# Altium PCB Funkcijski_generator_pcb.PcbDoc
Units mil, origin at the board's own origin, x right, y up, seen from the top; angles counter-clockwise.
Board outline 2185 x 1870 mil, 2 copper layers (Top Layer, Bottom Layer); 16 components, 13 nets, 48 pads, 0 vias.
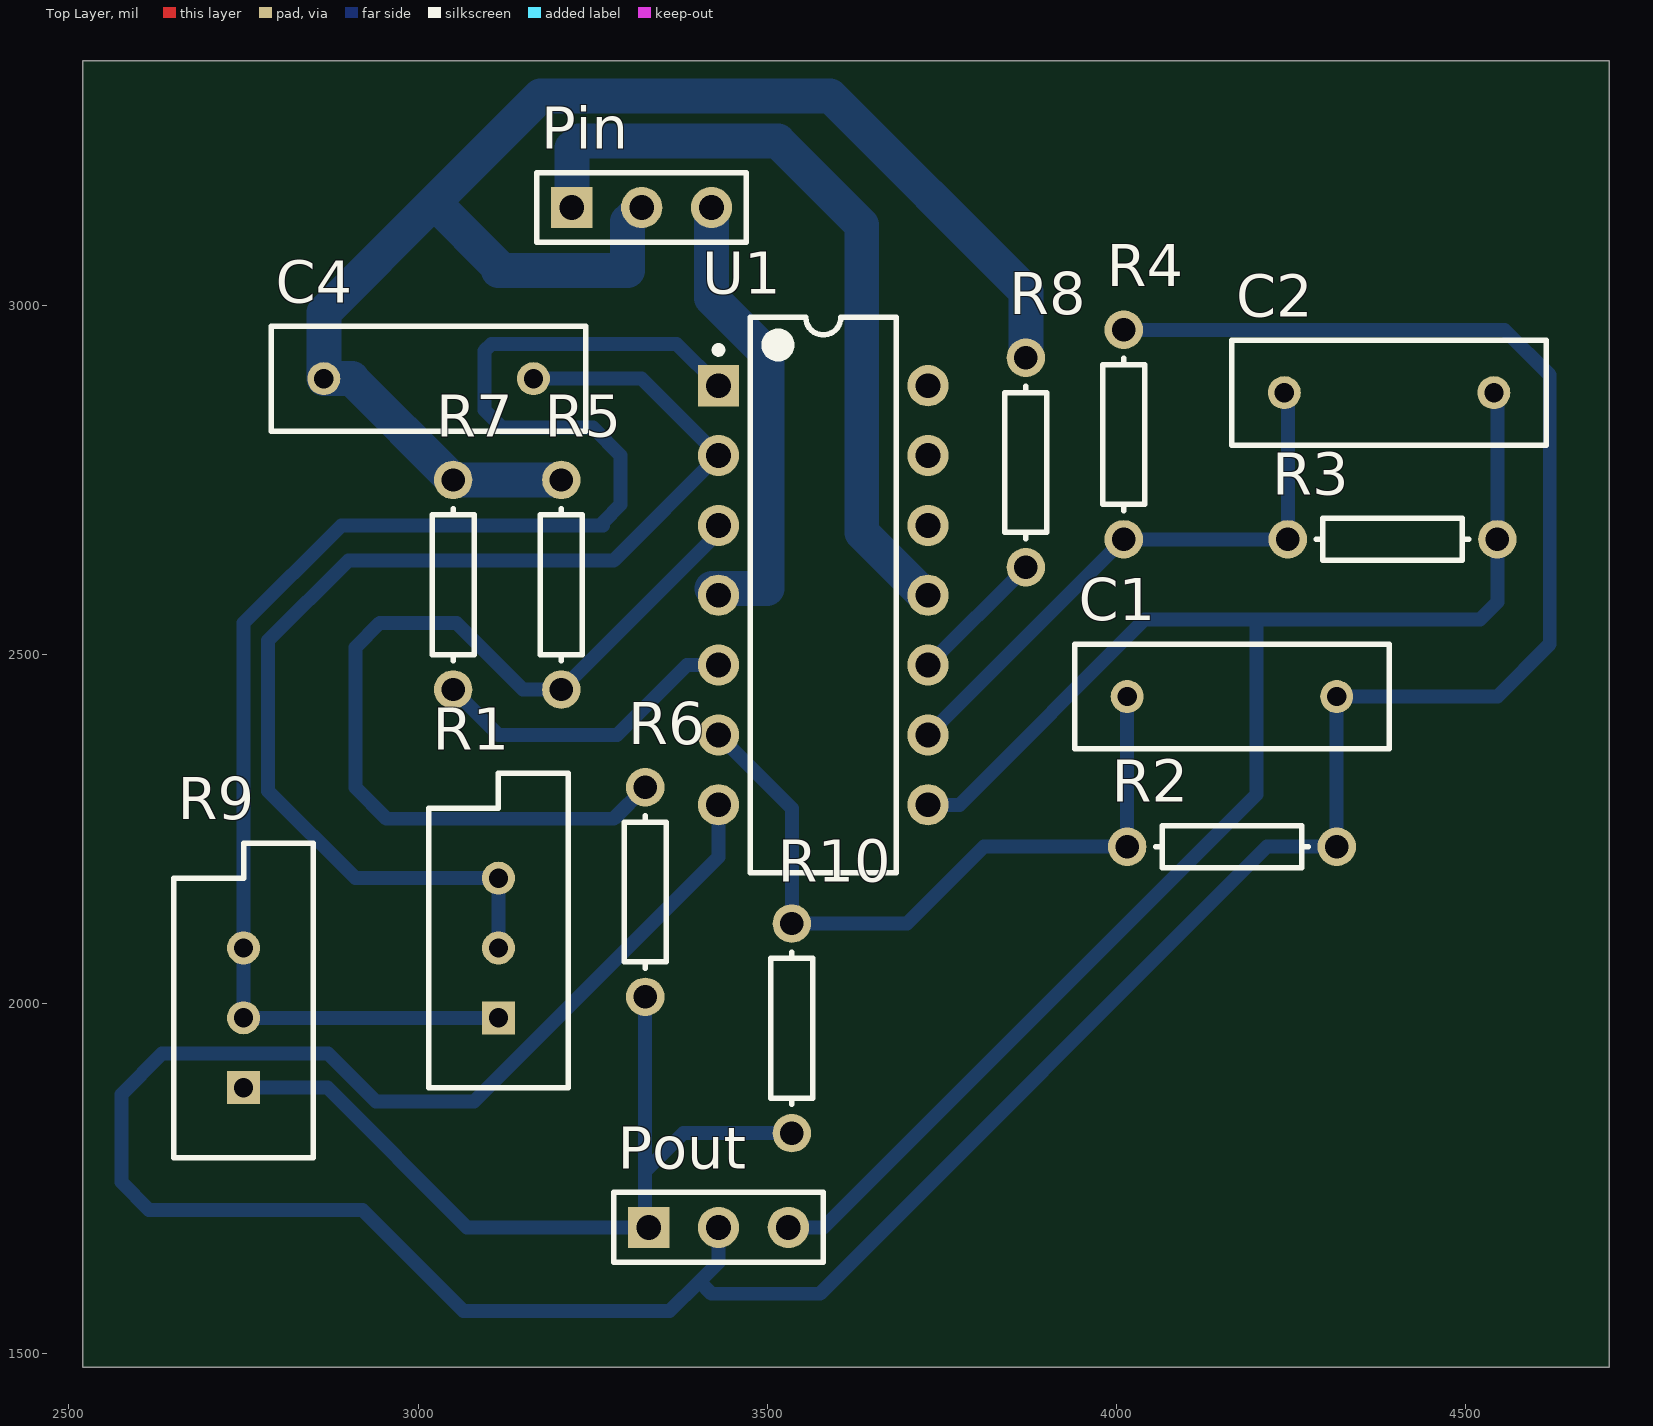
[diagram p0: Top Layer view]
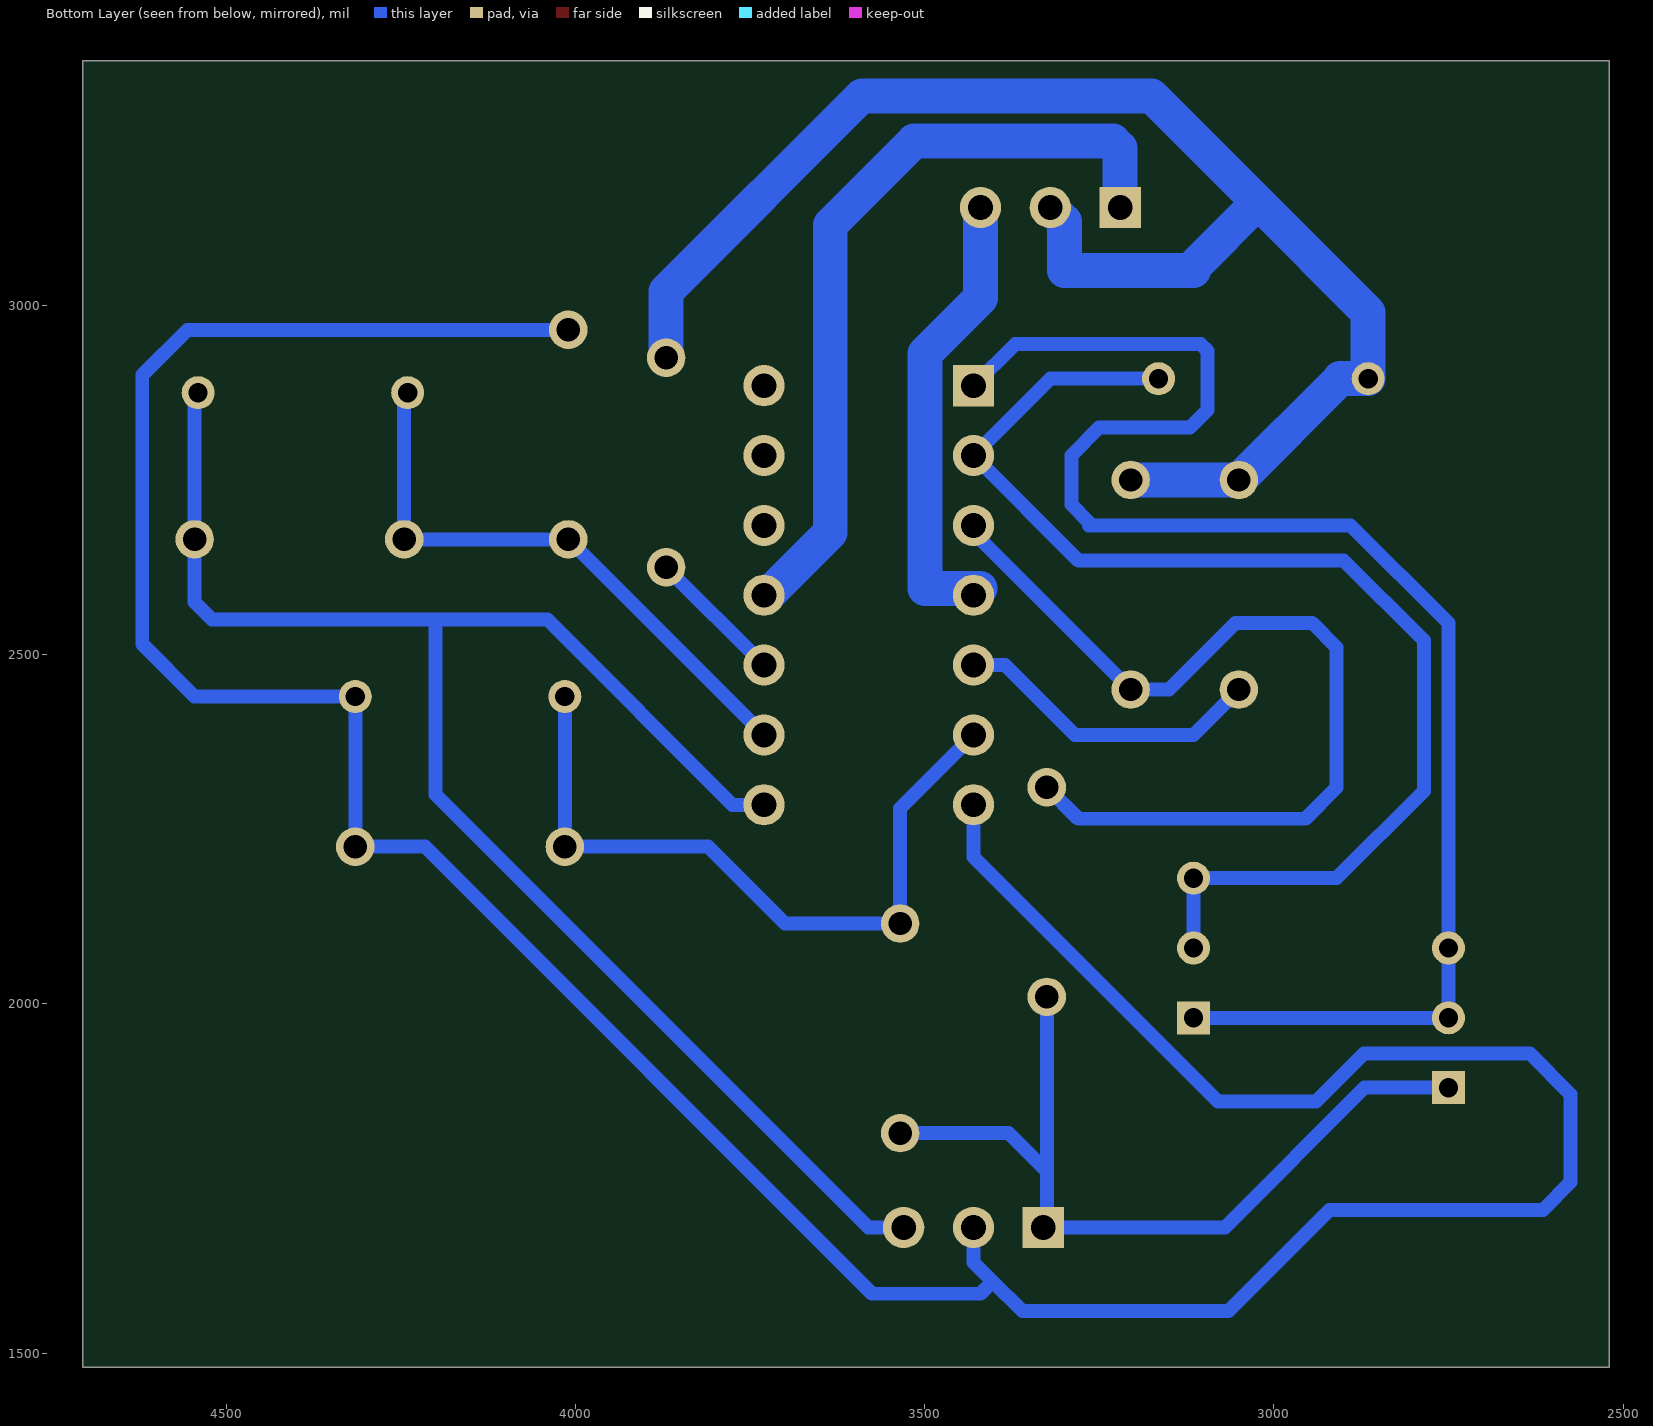
[diagram p1: Bottom Layer view, seen from below]

## Layer stack, top to bottom
Top Solder: solder mask 0.4, Solder Resist, Dk 3.5
Top Layer: signal copper 1.4
Dielectric 1: dielectric 12.6, FR-4, Dk 4.8
Bottom Layer: signal copper 1.4
Bottom Solder: solder mask 0.4, Solder Resist, Dk 3.5

## Board outline
2520,1480 4705,1480 4705,3350 2520,3350

## Design rules (kind name [scope] priority, off if disabled: settings)
Clearance Poligon [InPolygon] p1: gap=15 ignorepadtopadclearanceinfootprint=FALSE
Clearance [All] p2: gap=15 ignorepadtopadclearanceinfootprint=FALSE
PolygonConnect [All] p1: connectstyle=Relief reliefconductorwidth=10 reliefentries=4 polygonreliefangle="90 Angle" airgapwidth=10
RoutingLayers [All] p1: top layer_v5=FALSE bottom layer_v5=TRUE
RoutingVias [All] p1: holewidth=28 width=50 viastyle="Through Hole" minholewidth=28 minwidth=50 maxholewidth=28 maxwidth=50
SolderMaskExpansion [All] p1: expansion=4
Width WidthPower [InNetClass('Power')] p1: maxlimit=50 minlimit=50 preferedwidth=50
Width WidthSignals [InNetClass('Signals')] p2: maxlimit=20 minlimit=20 preferedwidth=20
29 further rules are at their usual default settings.

## Classes and differential pairs
net class Signals: NetC1_2 NetC2_2 NetC4_2 NetR1_1 NetR5_2 NetR7_2 NetR8_2 Vsine Vsquare Vtriangle
net class Power: GND VCC VEE

## Components (designator, comment, footprint, x,y, rotation, side; value= is the part's Value field where it differs from the comment)
C1 "Cap" RAD-0.3 4165,2440 r180 top value=220nF
C2 "Cap" RAD-0.3 4390,2875 r180 top value=10nF
C4 "Cap" RAD-0.3 3015,2895 r0 top value=100nF
Pin "Header 3" HDR1X3 3220,3140 r0 top
Pout "Header 3" HDR1X3 3330,1680 r0 top
R1 "RPot" VR5 3115,2080 r90 top value=200K
R2 "Res1" AXIAL-0.3 4165,2225 r0 top value=100K
R3 "Res1" AXIAL-0.3 4395,2665 r0 top value=220K
R4 "Res1" AXIAL-0.3 4010,2815 r270 top value=100K
R5 "Res1" AXIAL-0.3 3205,2600 r270 top value=27K
R6 "Res1" AXIAL-0.3 3325,2160 r270 top value=90K
R7 "Res1" AXIAL-0.3 3050,2600 r270 top value=10K
R8 "Res1" AXIAL-0.3 3870,2775 r270 top value=460K
R9 "RPot" VR5 2750,1980 r90 top value=10K
R10 "Res1" AXIAL-0.3 3535,1965 r90 top value=4.7K
U1 "LM324AD" DIP-14 3580,2585 r0 top

## Footprints (in the part's own frame and the unit in brackets; to place one, negate y for a bottom-side part, rotate by r counter-clockwise, add the part's x,y. Pads: shape width x height; smd on the part's side, far side on the other; paste and mask are expansions set on the pad)
AXIAL-0.3 [mm] "Axial Device, Thru-Hole; 2 Leads; 0.3 in Pin Spacing"
  round 1.4 hole 0.85: 1(-3.81,0) 2(3.81,0)
  silkscreen extent -2.77,-0.76 2.77,0.76
DIP-14 [mm] "DIP; 14 Leads; Row Spacing 7.62 mm; Pitch 2.54 mm"
  rect 1.5x1.5 hole 0.9: 1(-3.81,7.62)
  round 1.5 hole 0.9: 2(-3.81,5.08) 3(-3.81,2.54) 4(-3.81,0) 5(-3.81,-2.54) 6(-3.81,-5.08) 7(-3.81,-7.62) 8(3.81,-7.62) 9(3.81,-5.08) 10(3.81,-2.54) 11(3.81,0) 12(3.81,2.54) 13(3.81,5.08) 14(3.81,7.62)
  silkscreen extent -3.93,-10.1 2.65,10.1, body extent -3.6,-10.1 3.6,10.1, height 5.08
HDR1X3 [mm] "Connector; Header; 3 Position"
  rect 1.5x1.5 hole 0.9: 1(0,0)
  round 1.5 hole 0.9: 2(2.54,0) 3(5.08,0)
  silkscreen extent -1.27,-1.27 6.35,1.27
RAD-0.3 [mm] "Radial Cap, Thru-Hole; 2 Leads; 0.3 in Pin Spacing"
  round 1.2 hole 0.7: 1(-3.81,0) 2(3.81,0)
  silkscreen extent -5.71,-1.91 5.71,1.91
VR5 [mm] "Thru-Hole; 3 Leads"
  rect 1.2x1.2 hole 0.7: 1(-2.54,0)
  round 1.2 hole 0.7: 2(0,0) 3(2.54,0)
  silkscreen extent -5.08,-2.54 6.35,2.54

## Part data
C1 C2 C4: "Capacitor", LatestRevisionDate=17-Jul-2002, LatestRevisionNote="Re-released for DXP Platform.", PackageDescription="Radial Cap, Thru-Hole; 2 Leads; 0.3 in Pin Spacing", PackageReference=RAD-0.3, Published=8-Jun-2000, Publisher="Altium Limited"
Pin Pout: "Header, 3-Pin", LatestRevisionDate=17-Jul-2002, LatestRevisionNote="Re-released for DXP Platform.", Publisher="Altium Limited"
R1 R9: "Potentiometer", LatestRevisionDate=17-Jul-2002, LatestRevisionNote="Re-released for DXP Platform.", PackageDescription="Variable Resistor, Thru-Hole; 3 Leads", PackageReference=VR5, Published=8-Jun-2000, Publisher="Altium Limited", Set Position=0.5, Sim Note="Enter the Resistance value and the set point into parameter fields."
R2 R3 R4 R5 R6 R7 R8 R10: "Resistor", LatestRevisionDate=17-Jul-2002, LatestRevisionNote="Re-released for DXP Platform.", PackageDescription="Axial Device, Thru-Hole; 2 Leads; 0.3 in Pin Spacing", PackageReference=AXIAL-0.3, Published=8-Jun-2000, Publisher="Altium Limited"
U1: "Low-Power Quad Operational Amplifier", Code_IPC=SOIC127P600-14, ComponentLink1Description="Manufacturer Link", ComponentLink1URL=http://www.st.com/, ComponentLink2Description=Datasheet, ComponentLink2URL=http://www.st.com/stonline/products/literature/ds/4797/lm224a.pdf, DatasheetVersion=Nov-1997, LatestRevisionDate=13-Apr-2006, LatestRevisionNote="IPC-7351 Footprint Added.", PackageDescription="14-Pin Small Outline Integrated Circuit 1.27 mm Pitch", PackageReference=SO14, PackageVersion=Sep-1998, Published=24-Aug-2001, Publisher="Altium Limited"

## Nets (pads, with @x,y where several pads share a name; then routed paths per layer and width w, separated by ;. In a path a pad name is that pad's centre, name@x,y a point inside that pad or via, vN(x,y) a via of type N, cw(c..) or ccw(c..) an arc to the next point about the centre after c; other vN are vias at no path point)
GND: C4.1 Pin.2 R5.1 R7.1 R8.1 | length 2258.5
  Bottom Layer w50: R5.1 R7.1 2905,2895 C4.1 2865,2990 3022.5,3147.5 ; Pin.2 3300,3120 3300,3050 3115,3050 3115,3055 3022.5,3147.5 ; R8.1 3870,3020 3590,3300 3175,3300 3022.5,3147.5
NetC1_2: C1.2 R2.1 R10.2 U1.6 | length 1054.1
  Bottom Layer w20: U1.6 3535,2280 R10.2 3700,2115 3810,2225 R2.1 C1.2
NetC2_2: C2.2 R3.1 R4.2 U1.9 | length 843.1
  Bottom Layer w20: U1.9 R4.2 R3.1 4245,2870 C2.2
NetC4_2: C4.2 R1.2 R1.3 U1.2 | length 1762.1
  Bottom Layer w20: R1.2 R1.3 2910,2180 2785,2305 2785,2520 2900,2635 3280,2635 U1.2 3320,2895 C4.2
NetR1_1: R1.1 R9.2 R9.3 U1.1 | length 2284.3
  Bottom Layer w20: R1.1 R9.2 R9.3 2750,2545 2890,2685 3265,2685 3265,2690 3290,2715 3290,2785 3250,2825 3120,2825 3095,2850 3095,2935 3105,2945 3370,2945 U1.1
NetR5_2: R5.2 R6.1 U1.3 | length 1329.3
  Bottom Layer w20: R6.1 3280,2265 2955,2265 2910,2310 2910,2510 2945,2545 3055,2545 3150,2450 R5.2 3430,2675 U1.3
NetR7_2: R7.2 U1.5 | length 448.3
  Bottom Layer w20: R7.2 3115,2385 3285,2385 3385,2485 U1.5
NetR8_2: R8.2 U1.10 | length 198
  Bottom Layer w20: U1.10 R8.2
VCC: Pin.3 U1.4 | length 671.1
  Bottom Layer w50: Pin.3 3420,3010.62 3499.53,2931.1 3499.53,2594.64 3420.36,2594.64 U1.4
VEE: Pin.1 U1.11 | length 1126.1
  Bottom Layer w50: Pin.1 3220,3225 3230,3235 3515,3235 3635,3115 3635,2675 3725,2585 U1.11
Vsine: C2.1 Pout.3 R3.2 U1.8 | length 2414
  Bottom Layer w20: Pout.3 3580,1680 4200,2300 4200,2550 ; U1.8 3775,2285 4040,2550 4200,2550 ; C2.1 4545,2870 R3.2 4545,2575 4520,2550 4200,2550
Vsquare: Pout.1 R6.2 R9.1 R10.1 | length 1227.7
  Bottom Layer w20: R9.1 2870,1880 3070,1680 Pout.1 3325,1685 3325,1760 ; R6.2 3325,1760 ; R10.1 3380,1815 3325,1760
Vtriangle: C1.1 Pout.2 R2.2 R4.1 U1.7 | length 5021.1
  Bottom Layer w20: Pout.2 3430,1630 3402.5,1602.5 ; U1.7 3430,2210 3080,1860 2939.5,1860 2870.88,1928.62 2633.62,1928.62 2575,1870 2575,1745 2615,1705 2920,1705 3065,1560 3360,1560 3402.5,1602.5 ; R4.1 4555,2965 4620,2900 4620,2515 4545,2440 C1.1 R2.2 4215,2225 3575,1585 3420,1585 3402.5,1602.5
pads on no net: U1.12 U1.13 U1.14